# Altium PCB PDB REV 23.PcbDoc (part 1 of 2)
Units mil, origin at the board's own origin, x right, y up, seen from the top; angles counter-clockwise.
Board outline 3000 x 3000 mil, 4 copper layers (POWER/SIGNAL, SIG_GND, GND, Signal), stack 23.756 mil thick; 77 components, 56 nets, 261 pads, 101 vias.
Unrouted connection lines stored in the file: 79.
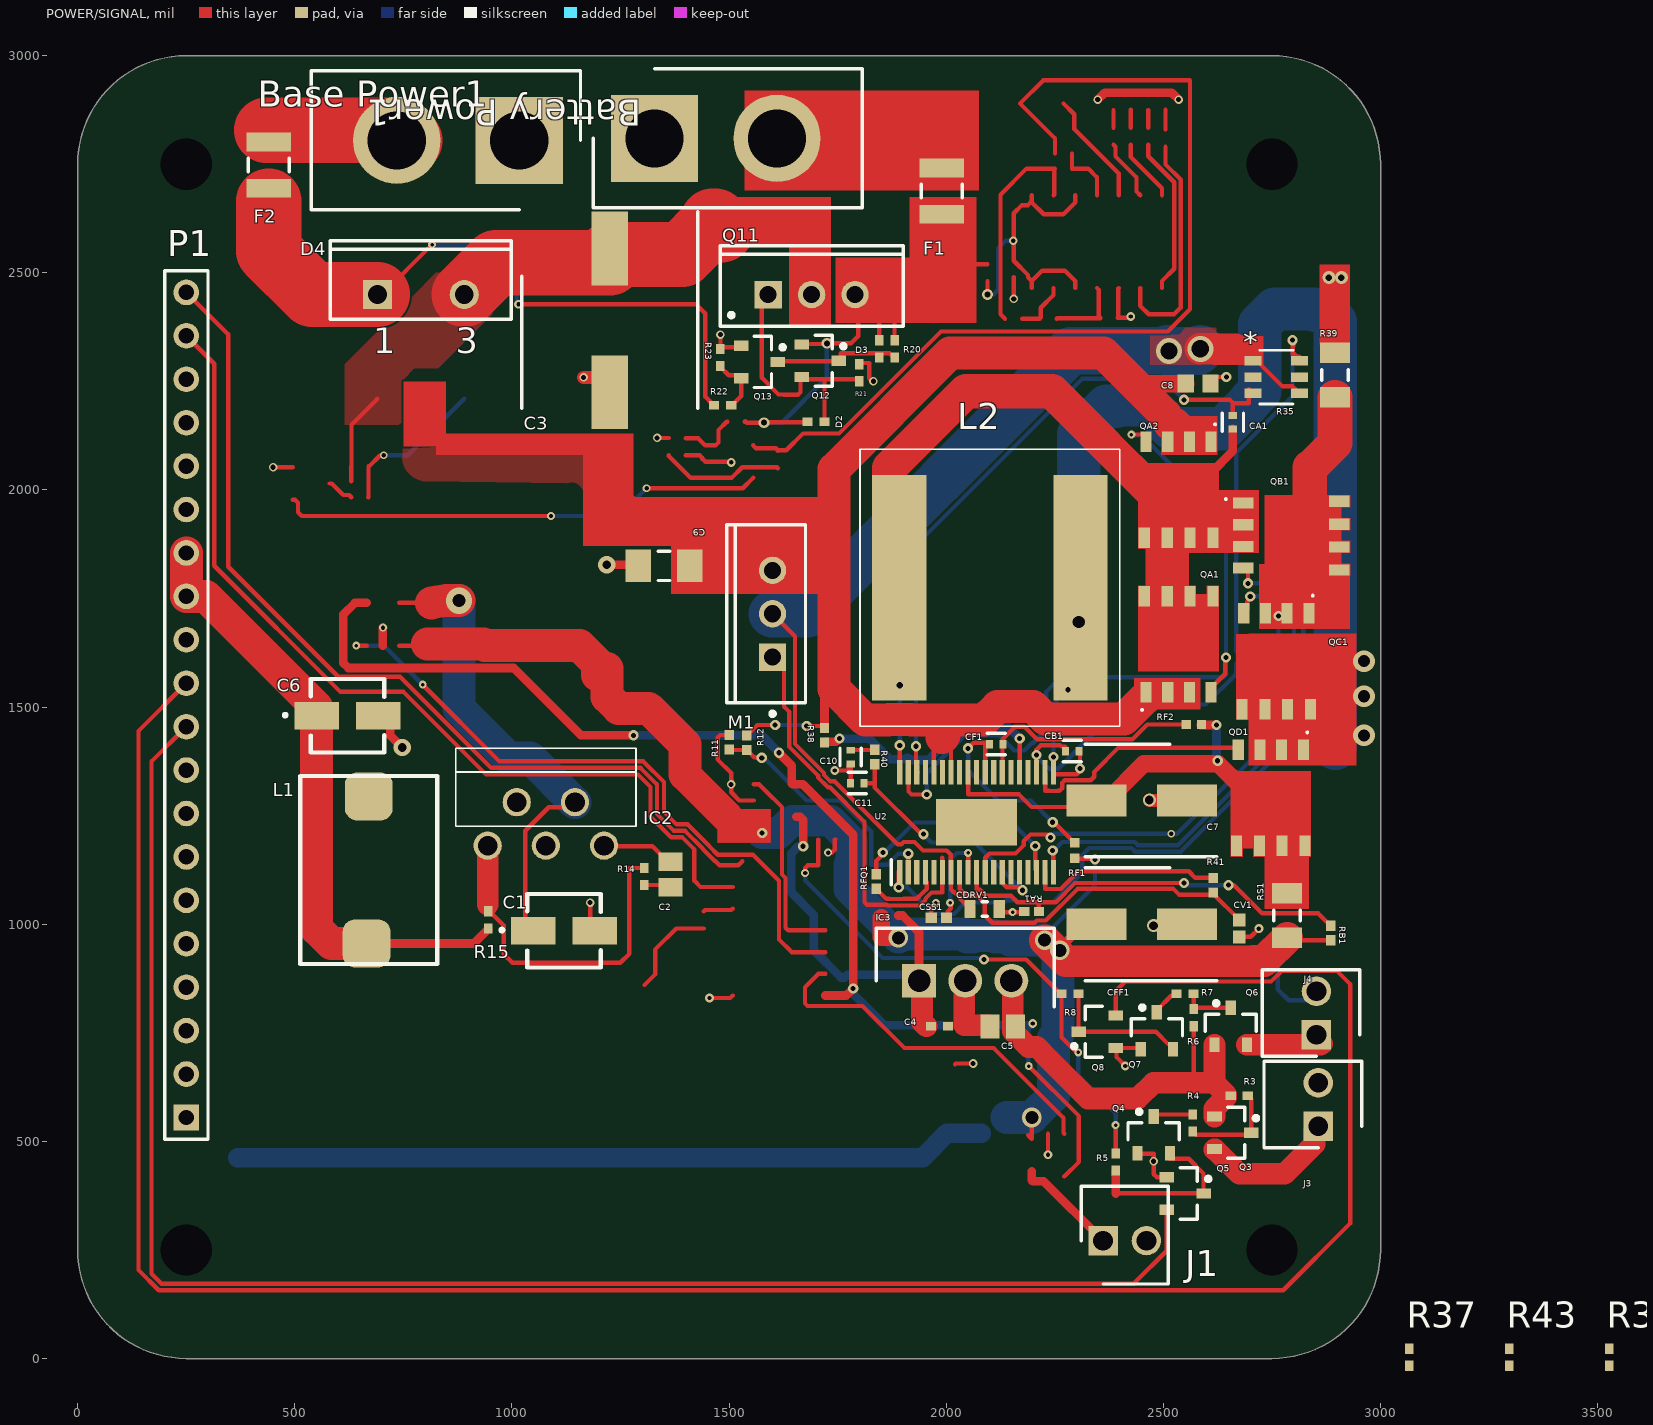
[diagram p0: POWER/SIGNAL view]
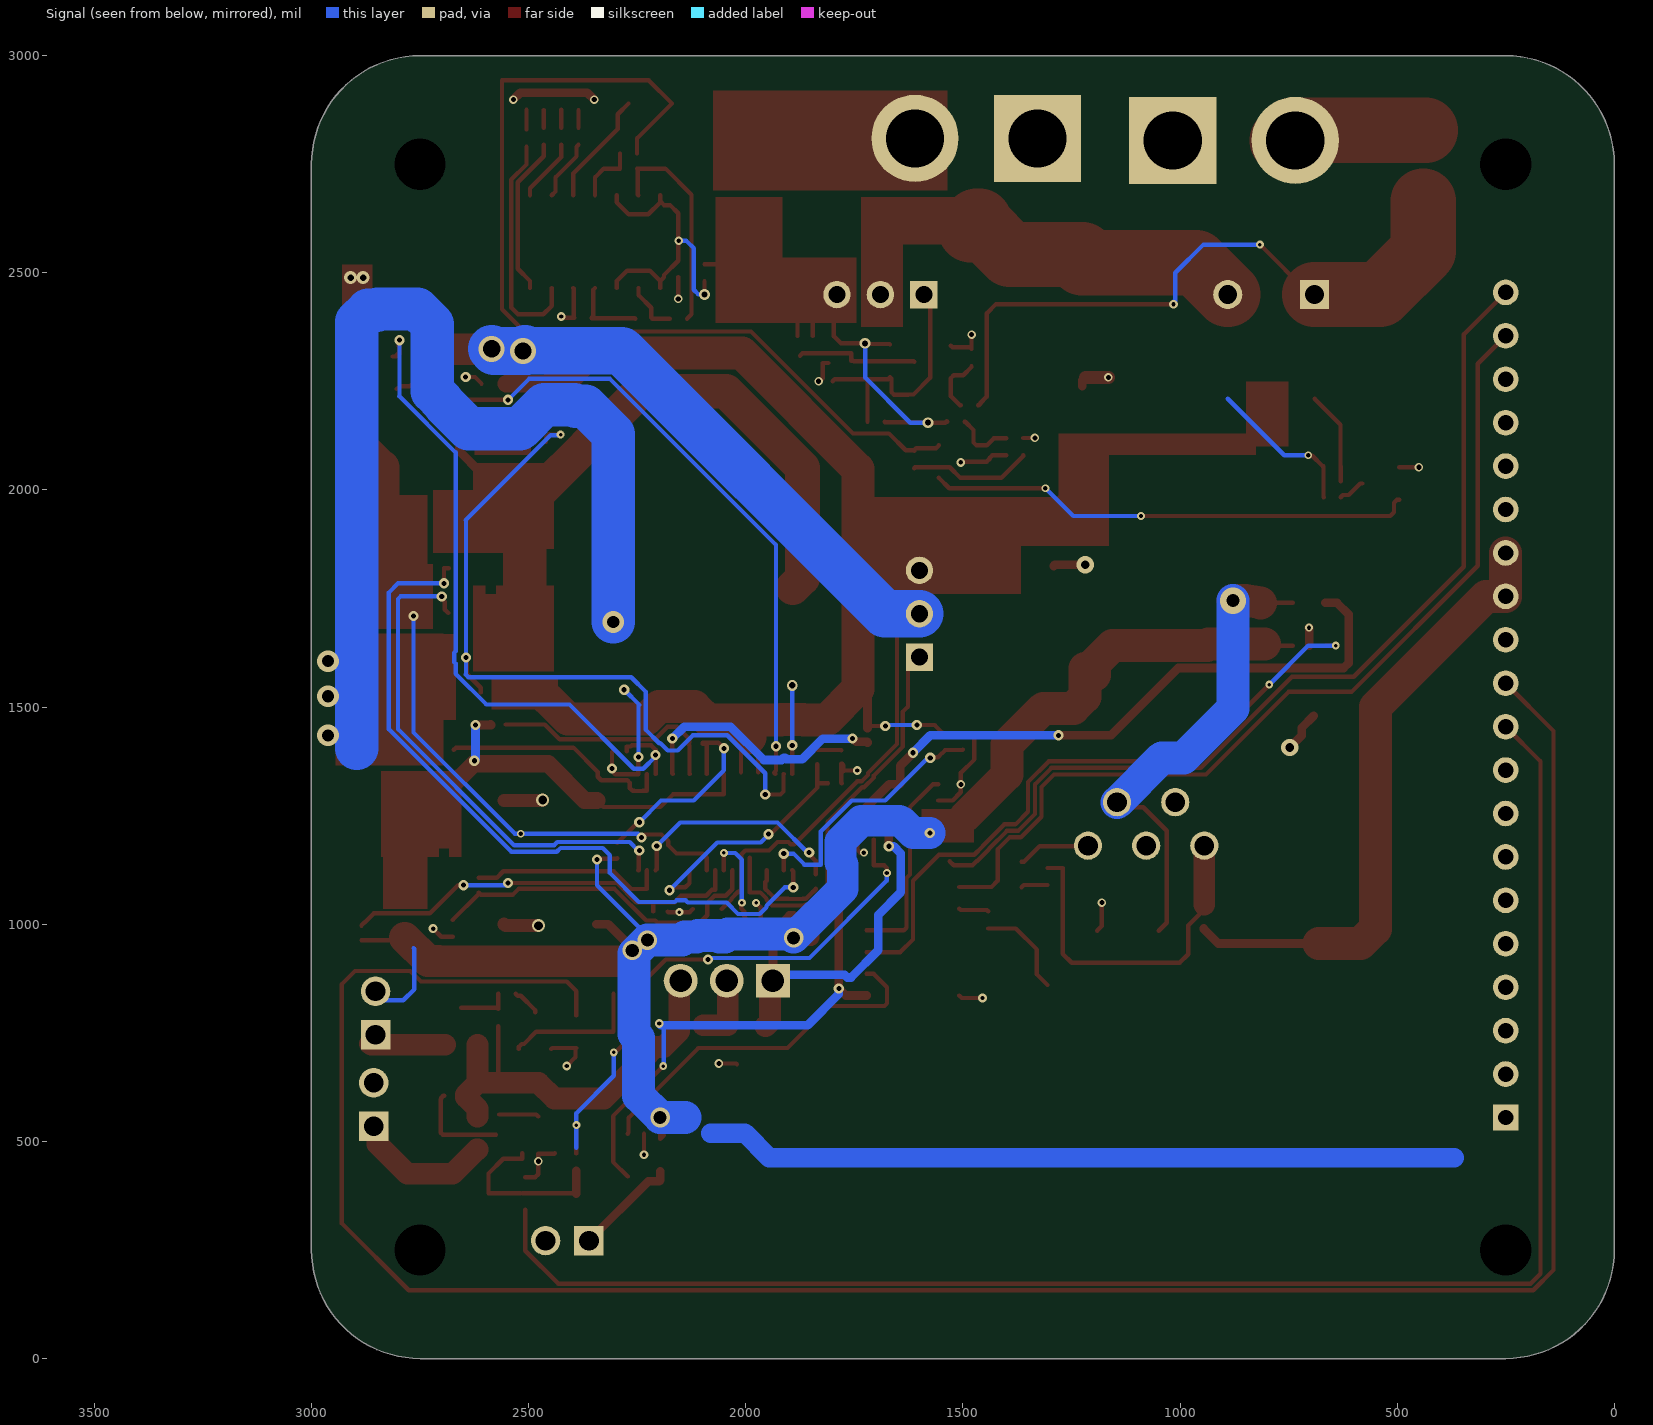
[diagram p1: Signal view, seen from below]
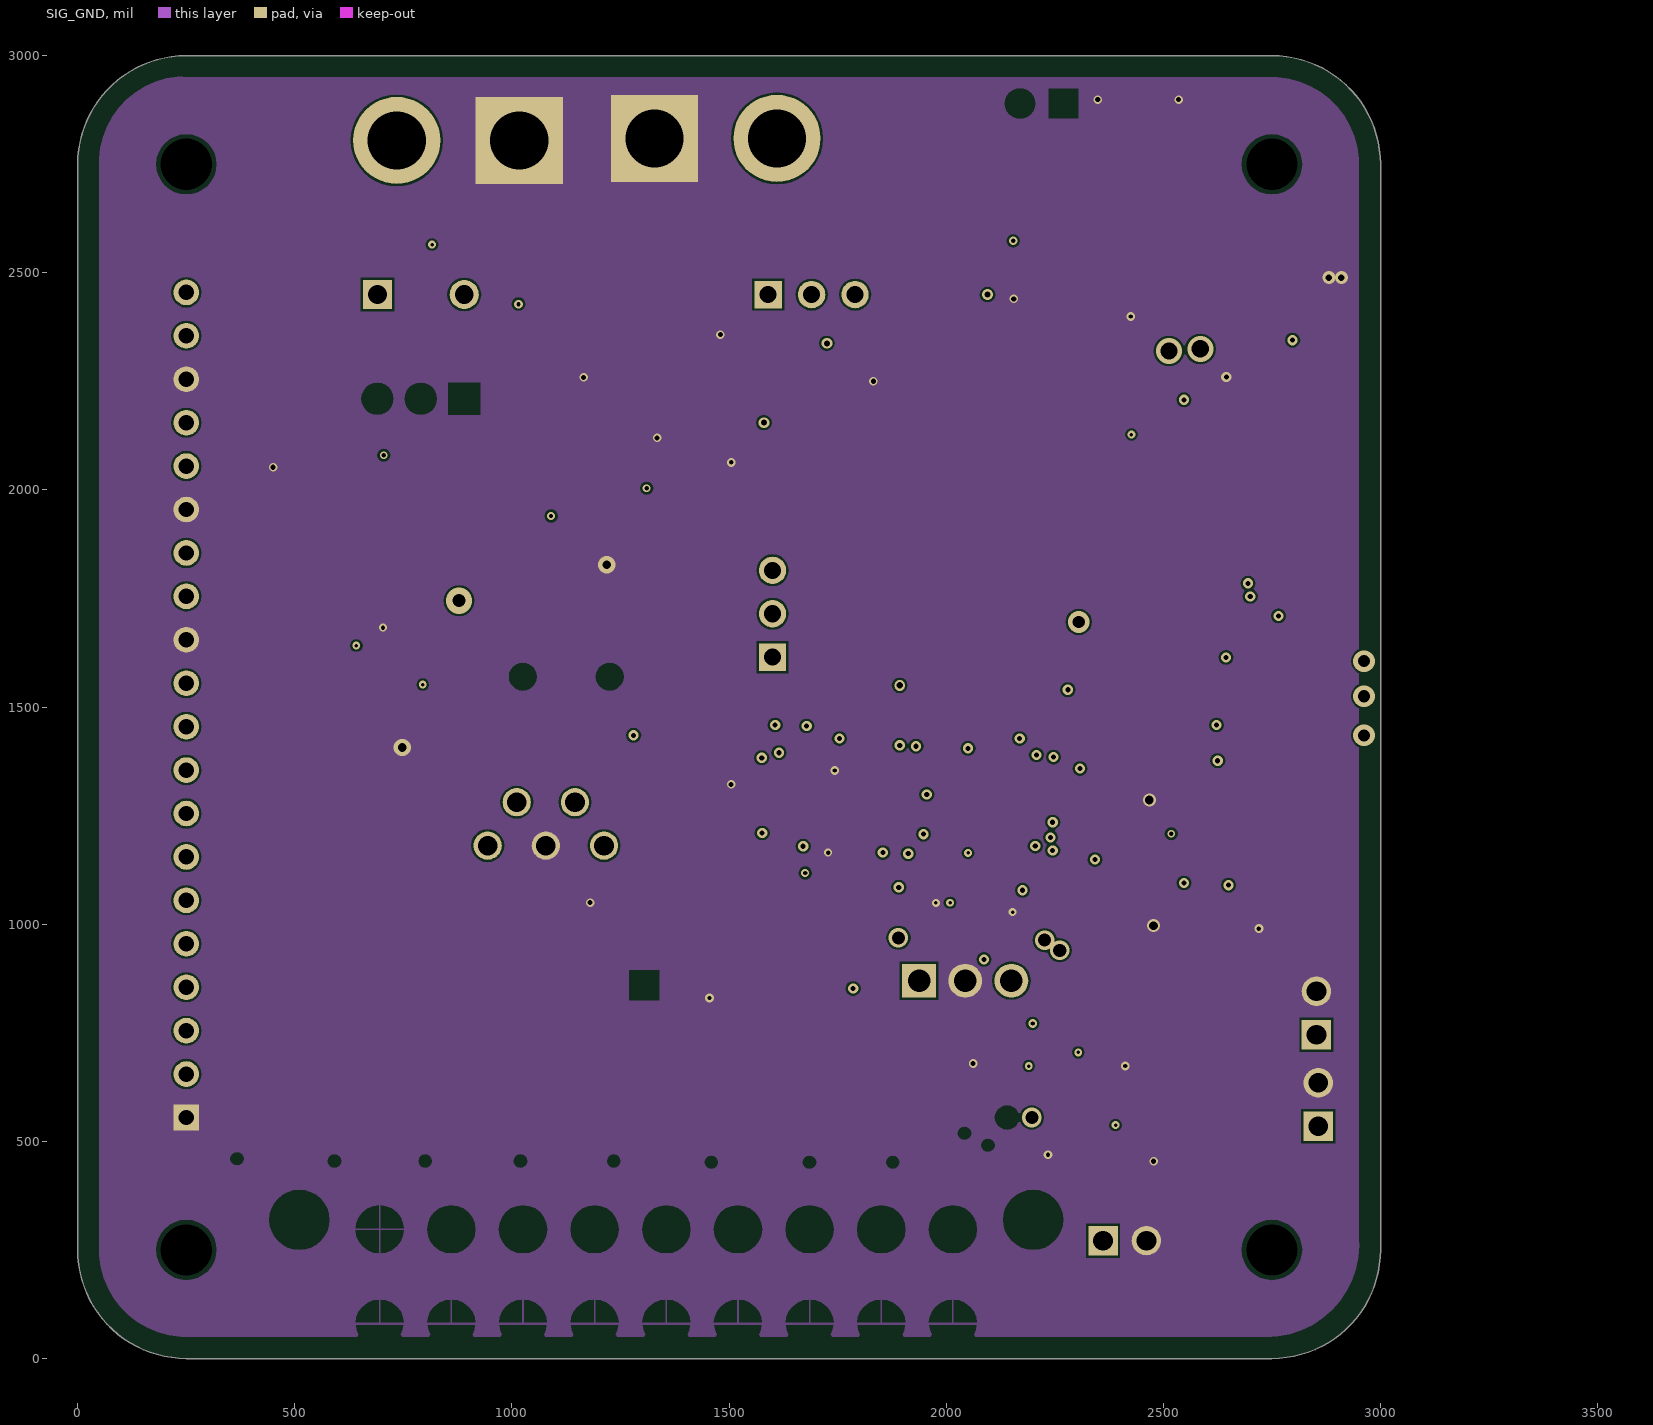
[diagram p2: SIG_GND]
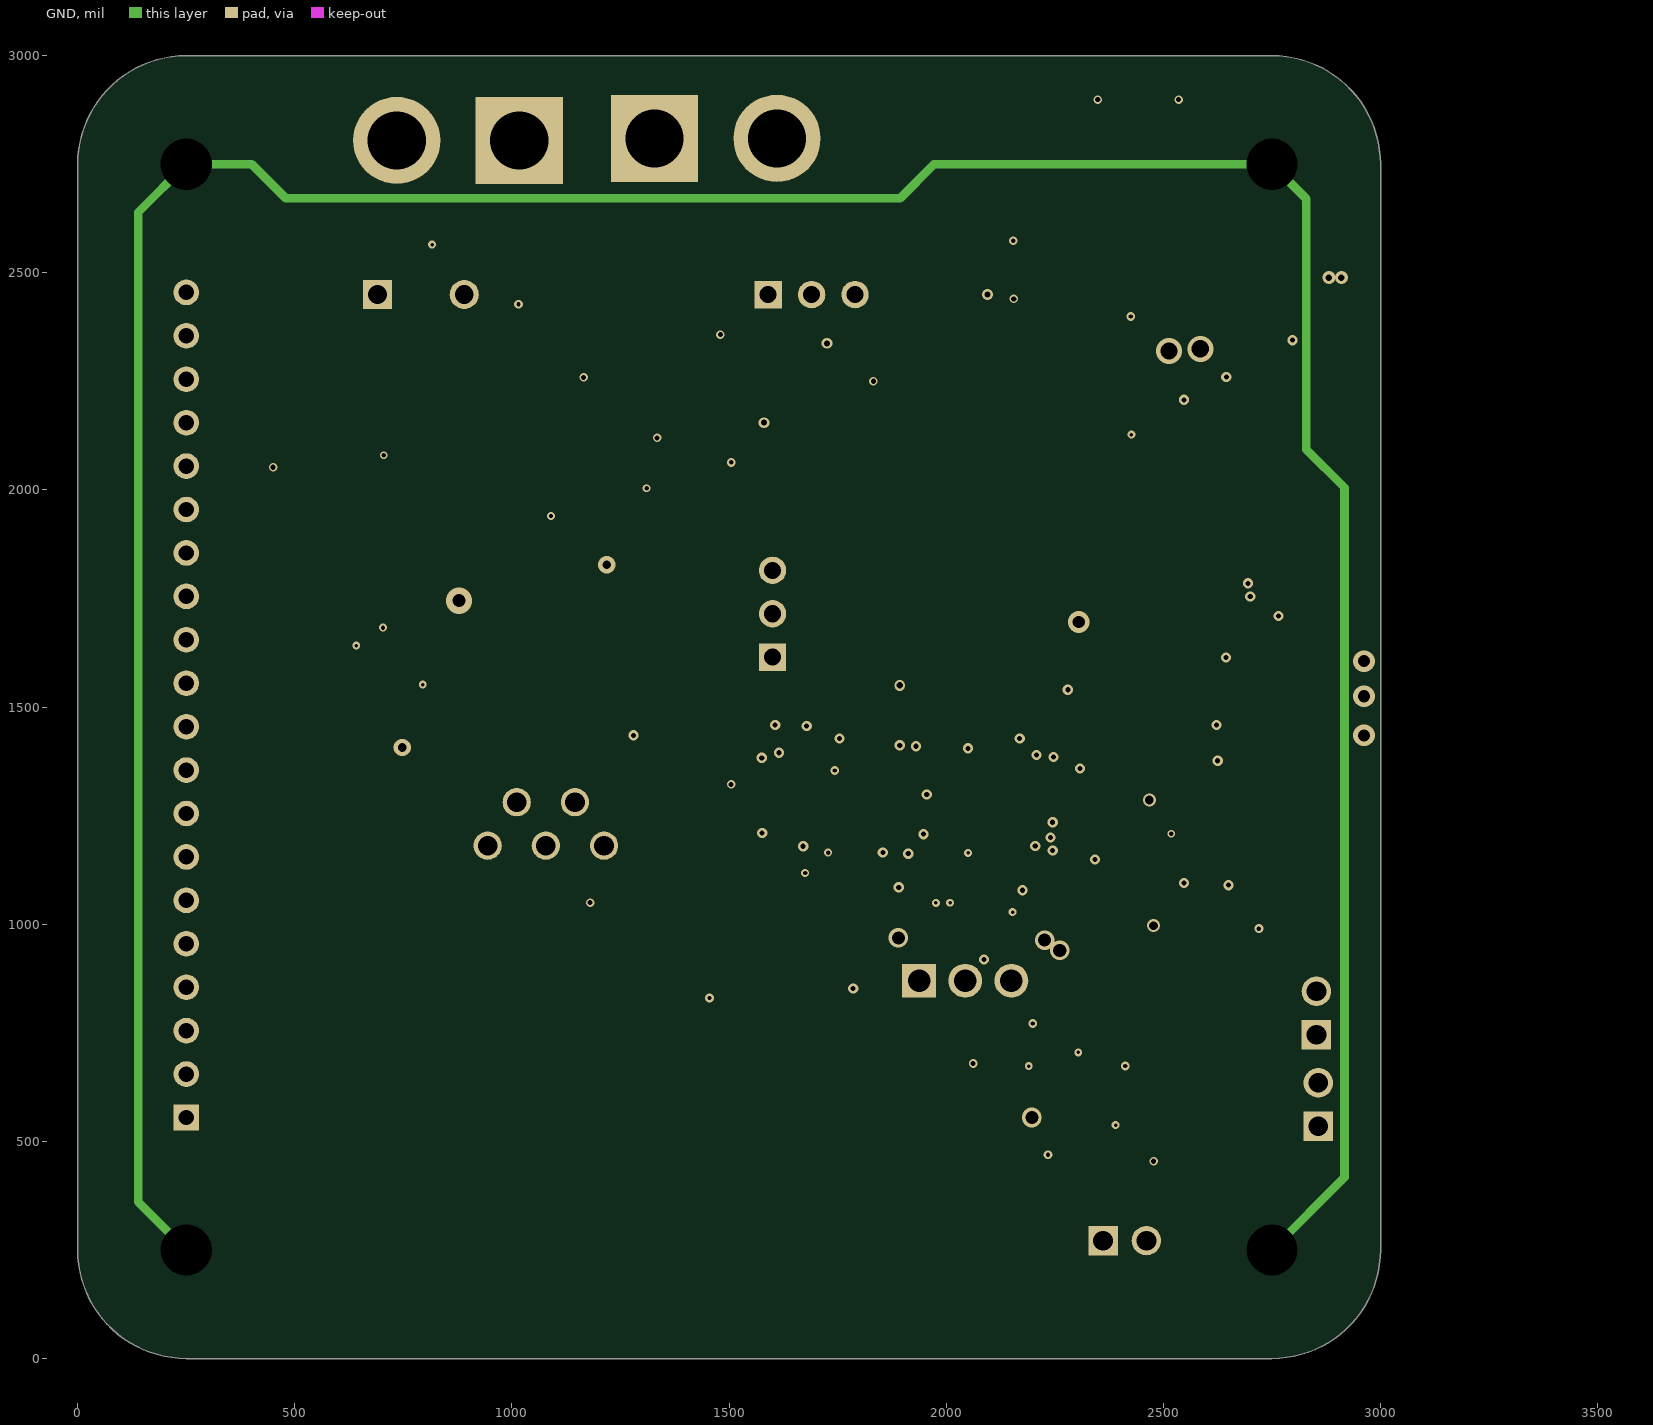
[diagram p3: GND]

## Layer stack, top to bottom
Top Solder: solder mask 0.4, Solder Resist, Dk 3.5
POWER/SIGNAL: signal copper 1.4
Dielectric 2: prepreg 2.8, PP-006, Dk 4.1
SIG_GND: signal copper 1.3778
Dielectric 1: dielectric 12.6, FR-4, Dk 4.8
GND: signal copper 1.3778
Dielectric 3: prepreg 2.8, PP-006, Dk 4.1
Signal: signal copper 1.4
Bottom Solder: solder mask 0.4, Solder Resist, Dk 3.5

## Board outline
250,0 cw(c250,250) 0,250 0,2750 cw(c250,2750) 250,3000 2750,3000 cw(c2750,2750) 3000,2750 3000,250 cw(c2750,250) 2750,0

## Design rules (kind name [scope] priority, off if disabled: settings)
BoardOutlineClearance [All] p1: gap=7.87 ignorepadtopadclearanceinfootprint=FALSE
Clearance [All] p1: gap=5 ignorepadtopadclearanceinfootprint=FALSE except(3.54: Arc-Arc Arc-Track Track-Track; 7.87: Arc-THPad Track-THPad; 9.84: Arc-Hole Track-Hole SMDPad-Hole THPad-Hole Via-Hole Fill-Hole Poly-Hole Region-Hole Text-Hole; 10: Arc-Via Track-Via)
ComponentClearance [All] p1: gap=5 collisioncheckmode=3 verticalgap=5 showdistances=TRUE
DiffPairsRouting [All] p1: maxlimit=10 minlimit=5 mostfreqgap=10 toplayer_prefgap=5 toplayer_minwidth=5 toplayer_maxwidth=1000 toplayer_prefwidth=5 midlayer1_mingap=10 midlayer1_minwidth=15 midlayer1_maxwidth=15 midlayer1_prefwidth=15 midlayer2_mingap=10 midlayer2_minwidth=15 midlayer2_maxwidth=15 midlayer2_prefwidth=15 bottomlayer_prefgap=5 bottomlayer_minwidth=5 bottomlayer_maxwidth=1000 bottomlayer_prefwidth=5 maxuncoupledlength=500
Height [All] p1: minheight=0 maxheight=71497.94 prefheight=500
HoleSize [All] p1: absolutevalues=TRUE maxlimit=248.03 minlimit=7.87 maxpercent=80.000 minpercent=20.000
HoleToHoleClearance [All] p1: gap=21.26 allowstackedmicrovias=FALSE
MinimumAnnularRing [All] p1: minimumring=7.87
MinimumSolderMaskSliver [All] p1: minsoldermaskwidth=0
PlaneClearance [All] p1: clearance=5
PlaneConnect PlaneConnectPowerPads [InPadClass('PowerPads')] p1: planeconnectstyle=Direct reliefexpansion=20 reliefentries=4 reliefconductorwidth=10 reliefairgap=10
PlaneConnect [All] p2: pad.planeconnectstyle=Relief pad.reliefexpansion=11.81 pad.reliefentries=4 pad.reliefconductorwidth=5 pad.reliefairgap=5 via.planeconnectstyle=Direct via.reliefexpansion=11.81 via.reliefentries=4 via.reliefconductorwidth=5 via.reliefairgap=5
PolygonConnect PolygonConnectPowerPads [All vs (InPadClass('PowerPads'))] p1: connectstyle=Direct reliefconductorwidth=10 reliefentries=4 polygonreliefangle="90 Angle" airgapwidth=10
PolygonConnect [All] p2: thpad.connectstyle=Relief thpad.reliefconductorwidth=5 thpad.reliefentries=4 thpad.polygonreliefangle="90 Angle" thpad.airgapwidth=5 smdpad.connectstyle=Relief smdpad.reliefconductorwidth=5 smdpad.reliefentries=4 smdpad.polygonreliefangle="90 Angle" smdpad.airgapwidth=5 via.connectstyle=Direct via.reliefconductorwidth=5 via.reliefentries=4 via.polygonreliefangle="90 Angle" via.airgapwidth=5
RoutingVias [All] p1: holewidth=11.81 width=23.62 viastyle="Through Hole" minholewidth=7.87 minwidth=17.72 maxholewidth=248.03 maxwidth=259.84
SilkToSilkClearance [All] p1: silktosilkclearance=0
SilkToSolderMaskClearance [IsPad] p1: minsilkscreentomaskgap=5 clearancetoexposedcopper=TRUE
SolderMaskExpansion [All] p1: expansion=2.95
Width [All] p1: maxlimit=1000 minlimit=3.5 preferedwidth=5 midlayer1_maxwidth=100 midlayer2_maxwidth=100 midlayer2_prefwidth=3.5 bottomlayer_prefwidth=3.5 minimp=50.000000 maximp=50.000000 favimp=50.000000
20 further rules are at their usual default settings.

## Classes and differential pairs
component class U_SwitchingRegulator: C7 C8 C9 C10 C11 CA1 CB1 CDRV1 CF1 CFF1 CSS1 CV1 L2 M1 QA1 QA2 QB1 QC1 QD1 R11 R12 R35 R38 R39 R40 R41 RA1 RB1 RF1 RF2 RFQ1 RS1 U2
component class U_Switching_Scheme: C3 D2 D3 D4 Q11 Q12 Q13 R20 R21 R22 R23 R36 R37 R43
component class U_Supply&Switching: "Base Power1" "Battery Power1" F1 F2
component class U_Regulation: C1 C2 C4 C5 C6 IC2 IC3 L1 R14 R15
component class U_BusDistribution: J1 J3 J4 P1 Q3 Q4 Q5 Q6 Q7 Q8 R3 R4 R5 R6 R7 R8

## Components (designator, comment, footprint, x,y, rotation, side; value= is the part's Value field where it differs from the comment)
"Base Power1" "PRT-10474" PRT-10474 537.16,2644.5 r0 top
"Battery Power1" "PRT-10474" PRT-10474 1807.74,2970.19 r180 top
C1 "100nF" 865230640001 1120,985 r0 top
C2 "10uF Cap" C0805 1365,1114.53 r90 top value=10uF
C3 "EEE-FN1K470UL" CAPAE1030X1450N 1225,2390.74 r270 top value=47uF
C4 "C1005JB1V334K050BC" 0402 1984.53,765 r180 top value=330nF
C5 "CS0402KRX7R8BB104" C0805 2130,765 r0 top value=.1uF
C6 "100nF" 865230640001 620.87,1480 r0 top
C7 "EEE-1VA330WP" CAPAE660X800N 2450,1285 r180 top value=33uF
C8 "0.22uF 1206" CAPC1608X90X35ML10T15 2580,2245 r180 top
C9 "4.7uF 1206" CAPC3216X180X50ML20T25 1350,1825 r0 top
C10 "500R07W103KV4T" FP-GRM15-MFG 1780,1385 r270 top value=0.10µF
C11 "500R07W103KV4T" FP-GRM15-MFG 1795,1325 r180 top value=0.10µF
CA1 "CL05A224KO5NNNC" FP-GRM15-MFG 2660,2156.1 r90 top value=0.22µF
CB1 "CL05A224KO5NNNC" FP-GRM15-MFG 2290,1398.72 r0 top value=0.22µF
CDRV1 "C1608X5R1A106K080AC" CAPC1608X90X20ML10 2088.57,1035 r180 top
CF1 "C1608X5R1C335K080AC" FP-GRM15-MFG 2115,1415 r0 top value=3.3uF
CFF1 "220uF 6.6mm" CAPAE660X800N 2450,1000 r180 top value=Value
CSS1 "GRM155R71H472KA01J" CAPC1005X55X25NL05T10 1983.11,1015 r0 top
CV1 "GRM155R60J225ME15D" CAPC1005X55X25ML05T10 2675,990.31 r90 top value=2.2uF
D2 "BZT52C9V1LP-7" 0402 1700,2157.2 r180 top
D3 "BZT52C9V1LP-7" 0402 1846,2325 r90 top
D4 "STPSC20065DY" TO-220AC 790,2450 r0 top
F1 "Battery Power Fuse" 14-1210 1990,2688.15 r270 top
F2 "Ground Power Fuse" 14-1210 440,2748.15 r270 top
IC2 "MC33167TG" MC33167TG 943.98,1180 r0 top
IC3 "L78S18CV" TO270P460X1020X2008-3P 1937.4,870 r0 top
J1 "640456-2" 16404562 2312,171.04 r0 top
J3 "640456-2" 16404562 2957.19,485.96 r90 top
J4 "640456-2" 16404562 2952.98,696.67 r90 top
L1 "190uH Inductor" PA2982 675.2,1125 r90 top value=190uH
L2 "XAL1510-103MED" XAL1513153MEB 2100.47,1775 r180 top
M1 "IPP024N06N3 G" INF-PG-TO220-3-1_A_V 1600,1715 r180 top
P1 "Header 20" HDR1X20 250,555 r90 top
Q3 "MED power PMOS" SOT23_L 2660.04,520 r0 top
Q4 "Low Power NMOS" SOT23_L 2477.64,514.92 r90 top
Q5 "Low power NMOS" SOT23_L 2550.18,380.16 r0 top
Q6 "MED power PMOS" SOT23_L 2655.04,765 r90 top
Q7 "Low Power NMOS" SOT23_L 2485.04,755 r90 top
Q8 "Low Power NMOS" SOT23_L 2347.72,752.4 r180 top
Q11 "SQP100P06-9M3L_GE3" TO-220AB 1690,2450 r0 top
Q12 "ISS55EP06LMXTSA1" SOT23_L 1710,2297.5 r0 top
Q13 "2N7002NXAK" SOT23_L 1570,2295 r0 top
QA1 "BSC110N06NS3 G" INF-PG-TDSON-8-1_V 2535,1645 r0 top
QA2 "BSC110N06NS3 G" INF-PG-TDSON-8-1_V 2535,2000 r180 top
QB1 "BSC110N06NS3 G" INF-PG-TDSON-8-1_V 2795,1895 r270 top
QC1 "BSC057N08NS3 G" INF-PG-TDSON-8-1_V 2760,1605.35 r180 top
QD1 "BSC057N08NS3 G" INF-PG-TDSON-8-1_V 2747.4,1290.51 r180 top
R3 "Res1" 0402 2674.72,605 r180 top value=1.6k
R4 "CRGP0402F2K2" 0402 2567.54,542.19 r270 top value=2.2k
R5 "Res1" 0402 2390.02,452.34 r90 top value=100k
R6 "Res1" 0402 2570.04,785 r270 top value=1.6k
R7 "CRGP0402F2K2" 0402 2549.72,840 r0 top value=2.2k
R8 "Res1" 0402 2285,840 r180 top value=100k
R11 "RMCF0402FT1K21" RESC1005X40X25NL05T10 1500,1419 r90 top value=1.21K
R12 "RP73PF1E133KBTD" RESC1005X40X25NL05T10 1541,1418 r270 top
R14 "Res8" 0402 1305,1110 r270 top value=68k
R15 "Res9" 0402 945,1010 r270 top value=6.8k
R20 "RC0402FR-0710KL" 0402 1881,2325 r90 top value=10k
R21 "ERJ-PA2F6201X" 0402 1800,2270 r90 top value=6.2k
R22 "CRGP0402F2K2" 0402 1485,2195 r180 top value=2.2k
R23 "RC0805JR-071KL" 0402 1480,2305 r270 top value=1k
R35 "Part Number: RF04UA2DTR" RF04 2750,2270 r0 top value=Value
R36 "ERJ-PA2F6201X" 0402 3526.5,3 r90 top value=6.2k
R37 "CRGP0402F2K2" 0402 3066,3 r90 top value=2.2k
R38 "RC0402JR-070RL" RESC1005X40X25NL05T10 1719.68,1435 r270 top
R39 "WSL12064L000FEA" RESC3216X89X51LL25T25 2895,2265 r270 top
R40 "10k 0402" RESC1005X40X25NL05T10 1835,1385 r90 top
R41 "100k 0402" RESC1005X40X25NL05T10 2615,1090 r90 top
R43 "RC0402FR-0710KL" 0402 3296,3 r90 top value=100k
RA1 "12.1k 0402" RESC1005X40X25NL05T10 2196.64,1029.38 r0 top
RB1 "230k 0402" RESC1005X40X25NL05T10 2885,980 r270 top
RF1 "100R 0402" RESC1005X40X25NL05T05 2295.63,1170 r270 top
RF2 "100R 0402" RESC1005X40X25NL05T05 2570.04,1460 r0 top
RFQ1 "57.9k 0402" RESC1005X40X25NL05T10 1838.6,1098.18 r90 top
RS1 "WSL12064L000FEA" RESC3216X89X51LL25T25 2785,1020 r270 top
U2 "Part Number: LTC3779HFE#PBF" SOP50P640X120-39N 2070,1235 r90 top value=Value

## Footprints (in the part's own frame and the unit in brackets; to place one, negate y for a bottom-side part, rotate by r counter-clockwise, add the part's x,y. Pads: shape width x height; smd on the part's side, far side on the other; paste and mask are expansions set on the pad)
14-1210 [mm] "Chip Resistor, Body 3.2x2.5mm, IPC High Density"
  rect 1.1x2.6 smd: 1(-1.35,0) 2(1.35,0)
  silkscreen extent -0.4,-1.2 0.4,1.2, body extent -1.68,-1.32 1.68,1.32, height 0.9
0402 [mm] "Chip Capacitor, Body 1.0x0.5mm, IPC High Density"
  rect 0.6x0.5 smd: 1(-0.5,0) 2(0.5,0)
  body extent -0.55,-0.3 0.55,0.3, height 1.3
16404562 [mm]
  rect 1.725x1.725 hole 1.15: 1(1.245,2.552)
  round 1.725 hole 1.15: 2(3.785,2.552)
  silkscreen extent -0.03,0.01 5.05,5.73, body extent 0.1,0.08 5.18,5.92, height 10.03
865230640001 [mm]
  rect 2.6x1.6 smd: 1(-1.8,0) 2(1.8,0)
  silkscreen extent -3.71,-2.15 2.15,2.15, body extent -2.54,-2.54 2.54,2.54, height 5.08
C0805 [mm] "Chip Capacitor, Body 2.0x1.3mm, IPC High Density"
  rect 1.1x1.4 smd: 1(-0.75,0) 2(0.75,0)
  body extent -1.1,-0.72 1.1,0.72, height 1.4
CAPAE660X800N [mm]
  rect 3.5x1.85 smd: 1(-2.65,0) 2(2.65,0)
  silkscreen extent -4.4,-3.3 3.3,3.3, body extent -3.7,-3.4 3.7,3.4, height 8
CAPAE1030X1450N [mm]
  rect 4.3x2.15 smd: 1(-4.2,0) 2(4.2,0)
  silkscreen extent -6.35,-5.15 5.15,5.15, body extent -5.65,-5.25 5.65,5.25, height 14.5
CAPC1005X55X25ML05T10 [mm] "Chip Capacitor, 2-Leads, Body 1.00x0.50mm, IPC Low Density"
  rect 0.76x0.72 smd: 1(-0.49,0) 2(0.49,0)
  body extent -0.53,-0.28 0.53,0.27, height 0.55
CAPC1005X55X25NL05T10 [mm] "Chip Capacitor, 2-Leads, Body 1.00x0.50mm, IPC Medium Density"
  rect 0.66x0.62 smd: 1(-0.44,0) 2(0.44,0)
  body extent -0.53,-0.28 0.53,0.27, height 0.55
CAPC1608X90X20ML10 [mm] "Chip Capacitor, 2-Leads, Body 1.70x0.90mm, IPC Low Density"
  rect 0.65x1.05 smd: 1(-0.85,0) 2(0.85,0)
  silkscreen extent -0.15,-0.43 0.15,0.43, body extent -0.85,-0.45 0.85,0.45, height 0.9
CAPC1608X90X35ML10T15 [mm] "Chip Capacitor, 2-Leads, Body 1.7x0.9mm, IPC Low Density"
  rect 0.95x1.05 smd: 1(-0.725,0) 2(0.725,0)
  body extent -0.85,-0.45 0.85,0.45, height 0.9
CAPC3216X180X50ML20T25 [mm] "Chip Capacitor, 2-Leads, Body 3.40x1.80mm, IPC Low Density"
  rect 1.5x1.9 smd: 1(-1.5,0) 2(1.5,0)
  silkscreen extent -0.35,-0.85 0.35,0.85, body extent -1.7,-0.9 1.7,0.9, height 1.8
FP-GRM15-MFG [mm]
  rect 0.4x0.5 smd paste+0 mask+0: 1(-0.4,0) 2(0.4,0)
  silkscreen extent -0.53,-0.63 0.53,0.63, body extent -0.7,-0.38 0.7,0.38, height 0.25
HDR1X20 [mm] "Connector; Header; 20 Position"
  rect 1.5x1.5 hole 0.9: 1(0,0)
  round 1.5 hole 0.9: 2(2.54,0) 3(5.08,0) 4(7.62,0) 5(10.16,0) 6(12.7,0) 7(15.24,0) 8(17.78,0) 9(20.32,0) 10(22.86,0) 11(25.4,0) 12(27.94,0) 13(30.48,0) 14(33.02,0) 15(35.56,0) 16(38.1,0) 17(40.64,0) 18(43.18,0) 19(45.72,0) 20(48.26,0)
  silkscreen extent -1.27,-1.27 49.53,1.27, body extent 24.08,-1 24.18,1, height 0.23
INF-PG-TDSON-8-1_V [mm] "TDSON, 8-Leads, Body 6.15x5.15mm, Pitch 1.27mm"
  rect 0.65x1.2 smd: 1(-1.905,-2.825) 2(-0.635,-2.825) 3(0.635,-2.825) 4(1.905,-2.825) 5(2.007,2.794) 6(0.66,2.794) 7(-0.66,2.794) 8(-2.007,2.794)
  POWER/SIGNAL region: -2.35,2.925 -2.35,-1.575 2.35,-1.575 2.35,2.925
  POWER/SIGNAL region: -2.35,2.925 -1.65,2.925 -1.65,3.425 -2.35,3.425
  POWER/SIGNAL region: 1.65,2.925 2.35,2.925 2.35,3.425 1.65,3.425
  POWER/SIGNAL region: -1.015,2.925 -0.315,2.925 -0.315,3.425 -1.015,3.425
  POWER/SIGNAL region: 0.315,2.925 1.015,2.925 1.015,3.425 0.315,3.425
  silkscreen extent -2.23,-3.94 -2.03,-3.74, body extent -2.58,-3.08 2.58,3.08, height 1
INF-PG-TO220-3-1_A_V [mm] "FM, 3-Leads, Body 10.03x8.98mm, Pitch 2.54mm"
  rect 1.6x1.6 hole 1: 1(0,2.54)
  round 1.6 hole 1: 2(0,0) 3(0,-2.54)
  silkscreen extent -1.93,-5.2 2.67,5.97, body extent -1.93,-5.2 2.67,5.2, height 20.75
MC33167TG [mm]
  round 1.65 hole 1.15: 1(-0.001,0.025) 2(1.701,2.565) 3(3.403,0.025) 4(5.105,2.565) 5(6.807,0.025)
  silkscreen extent -1.87,1.16 8.67,5.73
PA2982 [mm]
  rrect50% 2.8x2.8 smd: 1(-4.3,0.254) 2(4.3,0.127)
  silkscreen extent -5.5,-3.87 5.5,4.13
PRT-10474 [mm]
  rect 5.1x5.1 hole 3.4: 1(12.18,4.077)
  round 5.1 hole 3.4: 2(5.016,4.077)
  silkscreen extent 0.03,0.01 15.76,8.14, body extent -0.08,0.02 15.86,8.15, height 15.61
RESC1005X40X25NL05T05 [mm] "Chip Resistor, 2-Leads, Body 1.00x0.50mm, IPC Medium Density"
  rect 0.55x0.55 smd: 1(-0.45,0) 2(0.45,0)
  body extent -0.53,-0.27 0.53,0.28, height 0.4
RESC1005X40X25NL05T10 [mm] "Chip Resistor, 2-Leads, Body 1.00x0.50mm, IPC Medium Density"
  rect 0.6x0.55 smd: 1(-0.425,0) 2(0.425,0)
  body extent -0.53,-0.27 0.53,0.28, height 0.4
RESC3216X89X51LL25T25 [mm] "Chip Resistor, 2-Leads, Body 3.20x1.60mm, IPC High Density"
  rect 1.2x1.75 smd: 1(-1.3,0) 2(1.3,0)
  silkscreen extent -0.3,-0.77 0.3,0.77, body extent -1.73,-0.92 1.73,0.92, height 0.89
RF04 [mil]
  rect 40x22 smd paste+0 mask+0: 1(-43.5,27.4) 2(-43.5,-10) 3(-43.5,-47.4) 4(63.5,-47.4) 5(63.5,-10) 6(63.5,27.4)
  silkscreen extent -28,-72 48,52, body extent 10,-10 20,0, height 10
SOP50P640X120-39N [mm]
  rect 1.45x0.3 smd: 1(-2.925,4.5) 2(-2.925,4) 3(-2.925,3.5) 4(-2.925,3) 5(-2.925,2.5) 6(-2.925,2) 7(-2.925,1.5) 8(-2.925,1) 9(-2.925,0.5) 10(-2.925,0) 11(-2.925,-0.5) 12(-2.925,-1) 13(-2.925,-1.5) 14(-2.925,-2) 15(-2.925,-2.5) 16(-2.925,-3) 17(-2.925,-3.5) 18(-2.925,-4) 19(-2.925,-4.5) 20(2.925,-4.5) 21(2.925,-4) 22(2.925,-3.5) 23(2.925,-3) 24(2.925,-2.5) 25(2.925,-2) 26(2.925,-1.5) 27(2.925,-1) 28(2.925,-0.5) 29(2.925,0) 30(2.925,0.5) 31(2.925,1) 32(2.925,1.5) 33(2.925,2) 34(2.925,2.5) 35(2.925,3) 36(2.925,3.5) 37(2.925,4) 38(2.925,4.5)
  rect 2.74x4.75 smd: 39(0,0)
  silkscreen extent -3.65,5 -2.2,5, body extent -3.2,-4.85 3.2,4.85, height 1.2
SOT23_L [mm] "SOT23, 3-Leads, Body 2.9x1.3mm, Pitch 0.95mm, Lead Span 2.3mm - Reverse Pinning, IPC High Density"
  rect 0.85x0.6 smd: 1(1.075,0) 2(-1.075,-0.95) 3(-1.075,0.95)
  silkscreen extent -0.3,-1.5 1.48,1.5, body extent -0.7,-1.5 0.7,1.5, height 1.1
TO270P460X1020X2008-3P [mm]
  rect 1.98x1.98 hole 1.32: 1(0,0)
  round 1.98 hole 1.32: 2(2.7,0) 3(5.4,0)
  silkscreen extent -2.5,-1.53 7.9,3.07, body extent -2.4,-1.53 7.8,3.07, height 19.21
TO-220AB [mm] "TO, Thru-Hole, Vertical, Heatsink Mounted; 3 In-Line Leads; Pitch 2.54 mm"
  rect 1.6x1.6 hole 1: 1(-2.54,0)
  round 1.6 hole 1: 2(0,0) 3(2.54,0)
  silkscreen extent -5.35,-1.85 5.35,2.85, body extent -5.4,-1.9 5.4,2.9, height 19.3
TO-220AC [mm] "TO, Thru-Hole, Vertical, Heatsink Mounted; 3 In-Line Leads (1 Absent); Pitch 2.54 mm"
  rect 1.7x1.7 hole 1.1: 1(-2.54,0)
  round 1.7 hole 1.1: 3(2.54,0)
  silkscreen extent -5.3,-1.45 5.3,3.15
XAL1513153MEB [mm]
  rect 3.18x13.2 smd: 1(-5.3,0) 2(5.3,0)
  silkscreen extent -7.6,-8.1 7.6,8.1, body extent -7.6,-8.1 7.6,8.1, height 13.1

## Part data
"Base Power1" "Battery Power1": "Connector", Manufacturer_Name=SparkFun, Mouser Part Number=474-PRT-10474, Datasheet Link=http://cdn.sparkfun.com/datasheets/Prototyping/xt60.pdf, Height=15.875mm, Manufacturer_Part_Number=PRT-10474, Mouser Price/Stock=https://www.mouser.com/Search/Refine.aspx?Keyword=474-PRT-10474
C1 C6: library part 865230640001, "Capacitor", Manufacturer_Name="Wurth Elektronik", Mouser Part Number=710-865230640001, Arrow Part Number=865230640001, Datasheet Link=http://uk.rs-online.com/webdocs/135a/0900766b8135a640.pdf, Manufacturer_Part_Number=865230640001, Mouser Price/Stock=https://www.mouser.co.uk/ProductDetail/Wurth-Elektronik/865230640001?qs=0KOYDY2FL28kfhWstjZGVg%3D%3D
C2: library part Cap, "Capacitor", LatestRevisionDate=17-Jul-2002, LatestRevisionNote="Re-released for DXP Platform.", PackageDescription="Radial Cap, Thru-Hole; 2 Leads; 0.3 in Pin Spacing", PackageReference=RAD-0.3, Published=8-Jun-2000, Publisher="Altium Limited"
C3: library part "Cap Pol1", "80VDC 47uF 20% 8x10.2mm AEC-Q200", MFG=Panasonic, MFG PN=EEH-ZF1J330P
C4: library part Cap, "CAP CER 0.33UF 35V JB 0402", Manufacturer 1="TDK Corporation", LatestRevisionDate=17-Jul-2002, LatestRevisionNote="Re-released for DXP Platform.", Manufacturer Part Number 1=C1005JB1V334K050BC, PackageDescription="Radial Cap, Thru-Hole; 2 Leads; 0.3 in Pin Spacing", PackageReference=RAD-0.3, Published=8-Jun-2000, Publisher="Altium Limited"
C5: library part Cap, "CAP CER 0.1UF 25V X7R 0402", Manufacturer 1=Yageo, LatestRevisionNote="Re-released for DXP Platform.", Manufacturer Part Number 1=CS0402KRX7R8BB104, PackageDescription="Radial Cap, Thru-Hole; 2 Leads; 0.3 in Pin Spacing", PackageReference=RAD-0.3, Publisher="Altium Limited"
C7: library part UCV1V221MCL1GS, "CAP ALUM 33UF 20% 35V SMD", Manufacturer 1="Panasonic Electronic Components", Manufacturer Part Number 1=EEE-1VA330WP
C8: library part CMP-2100-03642-1, "Chip Capacitor, 10 nF, +/- 10%, 50 V, -55 to 125 degC, 0603 (1608 Metric), RoHS, Tape and Reel", Capacitance=10nF, Case/Package=0603, Case Code (Metric)=1608, Dielectric=X7R, Dielectric Material=Ceramic, Insulation Resistance=10GR, Manufacturer=Murata, Max Operating Temperature=125degC, Min Operating Temperature=-55degC, Package Description="2-Pin Surface Mount Device, Body 1.6 x 0.8 mm", Package Quantity=1, Tolerance=10%, Voltage=50V, Case Code (Imperial)=0603, Datasheet URL=http://search.murata.co.jp/Ceramy/image/img/A01X/G101/ENG/GRM188R71H103KA01-01.pdf, Datasheet Version=42401.0, Depth=0.8mm, Height=0.8mm, Lead Free=LeadFree, Length=1.6mm, Manufacturer URL=http://www.murata.com/, Material=Ceramic, Mount=SurfaceMount, Number of Pins=2, Package Reference=0603, Packaging=TapeandReel, REACH SVHC=Unknown, RoHSCompliant=True, Termination=SMD/SMT, Thickness=0.035inch, Voltage Rating=50V, Voltage Rating (DC)=50V, Width=0.031inch
C9: library part CMP-2000-04991-1, "Chip Capacitor, 1 uF, +/- 10%, 25 V, -55 to 125 degC, 1206 (3216 Metric), RoHS, Tape and Reel", Capacitance=1uF, Capacitance - nF=1000nF, Case Code - in=1206, Case Code - mm=3216, Case Height=1.6mm, Case Length=3.2mm, Dielectric=X7R, Manufacturer=Kemet, Maximum Operating Temperature=+125C, Minimum Operating Temperature=-55C, Operating Temperature Range=-55Cto+125C, Package / Case=1206(3216metric), Package Description="2-Pin Surface Mount Device, Body 3.2 x 1.6 mm", Temperature Coefficient / Code=+/-15%, Tolerance=10%, Voltage Rating=25V, =C1206C105K3RAC7800, Brand=Kemet, Case Width=1.6mm, Class=Class1, Datasheet URL=https://ciiva.com/datasheet-click-18194173?src=ciiva&sig=6daff8c4, Datasheet Version=Jul-14, Dimensions=1.6mmWx3.2mmLx1.6mmH, Factory Pack Quantity=2000, Manufacturer URL=http://www.kemet.com/, Package Reference=1206, Packaging=Reel, Product=GeneralTypeMLCCs, Product Category=MultilayerCeramicCapacitorsMLCC-SMD/SMT, RoHS=Details, Series=C1206C, Termination Style=SMD/SMT, Type=SMDMLCCX7R6.3-250VDCCommericalGrade, Voltage Rating DC=25V
C10 C11: library part CMP-06035-000102-1, "CAP CER 0.1UF 16V X7R 0402", Capacitance=0.10nF, Manufacturer=Murata, Manufacturer 1="Johanson Dielectrics Inc.", Manufacturer Part Number=GRM155R71C104KA88D, Package=GRM15, Temperature="-55°C to +125°C", Temperature Characteristic=X7R, Temperature Range High=+125°C, Temperature Range Low=-55°C, Tolerance=10%, Voltage Rating=16Vdc, Category=Cap, ComponentLink2Description=Datasheet, ComponentLink2URL=https://search.murata.co.jp/Ceramy/image/img/A01X/G101/ENG/GRM155R71H471KA01-01A.pdf, Device Class L1="Passive Components", Device Class L2=Capacitors, Device Class L3="Ceramic Capacitors", Digikey Description="CAP CER 0.1UF 16V X7R 0402", Height=0.55mm, Ipc Land Pattern Name=CAPC10050X219, Lead Free=yes, Manufacturer Part Number 1=500R07W103KV4T, Material=Ceramic, Mouser Description="0402 0.1 uF 16V ±10 % Tolerance X7R SMT Multilayer Ceramic Capacitor", Octopart=https://octopart.com/grm155r71c104ka88d-murata-196880, RoHS=TRUE, Standoff Height=0mm
CA1 CB1: library part CMP-06035-000102-1, "CAP CER 0.22UF 16V X5R 0402", Manufacturer 1="Samsung Electro-Mechanics", Manufacturer Part Number 1=CL05A224KO5NNNC
CDRV1: library part CMP-2000-04979-1, "Chip Capacitor, 10 uF, +/- 10%, 10 V, -55 to 85 degC, 0603 (1608 Metric), RoHS, Tape and Reel", Capacitance=10µF, Manufacturer=TDK, Operating Temperature=-55degC~85degC, Package / Case=0603(1608Metric), Package Description="2-Pin Surface Mount Device, Body 1.6 x 0.8 mm", Package Reference=603, PCN Part Number=MLCCPartNumberChange30/Nov/2012, Ratings=-, Standard Package=1, Temperature Coefficient=X5R, Tolerance=±10%, Voltage - Rated=10V, Applications=GeneralPurpose, Category=Capacitors, Datasheet URL=http://download.siliconexpert.com/pdfs/2015/4/21/15/54/45/779/tdk_/manual/37024850441143360mlcc_commercial_general_en.pdf, Datasheet Version=Mar-15, Design Resources=20WNon-IsolatedBuckLEDDriverUsingPLLNK460KG, Family=CeramicCapacitors, Features=-, Height - Seated (Max)=-, Kits=445-9003-KIT-ND-KITCAPCERHICAPMLCCSMD, Lead Spacing=-, Lead Style=-, Manufacturer URL=http://www.tdk.com/, Mounting Type=SurfaceMount,MLCC, Online Catalog=CSeries,GeneralPurpose, Other Names=445-7486-1, Packaging=CutTape(CT), Product Training Modules=CSeriesGeneralApplicationsSEAT,CCV,andTVCLDesignToolsGuidetoReplacinganElectrolyticCapacitorwithanMLCC, RoHS Information=RoHSCertificate-MLCC, Series=C, Size / Dimension="0.063\"Lx0.031\"W(1.60mmx0.80mm)", Thickness (Max)="0.035\"(0.90mm)"
CF1: library part CMP-06035-000102-1, "CAP CER 3.3UF 16V X5R 0603", Manufacturer 1="TDK Corporation", Manufacturer Part Number 1=C1608X5R1C335K080AC
CFF1: library part UCV1V221MCL1GS, "No Description Available", Built_By=EMA_Cory, Copyright="Copyright (C) 2018 Accelerated Designs. All rights reserved", Manufacturer_Part_Number=UCV1V221MCL1GS, RefDes=RefDes, SourceLibrary=Nichicon_2019-09-13, Type=DEV, Vendor=Nichicon
CSS1: library part CMP-2008-04033-1, "CAP CER 4700PF 50V X7R 0402", Manufacturer 1=Murata, Manufacturer Part Number 1=GRM155R71H472KA01J
CV1: library part CMP-2008-04543-1, "CAP CER 2.2UF 6.3V X5R 0402", Manufacturer 1="Murata Electronics", Manufacturer Part Number 1=GRM155R60J225ME15D
D2 D3: library part "D Zener", "Zener Diode 9.1V 250mW ±6% Surface Mount X1-DFN1006-2", Package=0402, MFG="Diodes Incorporated", MFG PN=BZT52C9V1LP-7
D4: library part Diode, "Diode Silicon Carbide Schottky 650V 20A Through Hole TO-220AC", MFG=STMicroelectronics, MFG PN=STPSC20065DY
F1 F2: library part "Fuse 1", "Fuse", LatestRevisionDate=17-Jul-2002, LatestRevisionNote="Re-released for DXP Platform.", PackageDescription="Thru-Hole; 2 Leads", PackageReference=PIN-W2/E2.8, Published=8-Jun-2000, Publisher="Altium Limited"
IC2: "Integrated Circuit", Manufacturer_Name="ON Semiconductor", Mouser Part Number=863-MC33167TG, RS Part Number=7862414P, Allied_Number=70340012, Allied Price/Stock=http://www.alliedelec.com/on-semiconductor-mc33167tg/70340012/, Datasheet Link=http://www.onsemi.com/pub/Collateral/MC34167-D.PDF, Manufacturer_Part_Number=MC33167TG, Mouser Price/Stock=https://www.mouser.com/Search/Refine.aspx?Keyword=863-MC33167TG, RS Price/Stock=http://uk.rs-online.com/web/p/products/7862414P
IC3: "Integrated Circuit", Manufacturer_Name=STMicroelectronics, Mouser Part Number=511-L78S18CV, RS Part Number=6869022P, Allied_Number=70013917, Allied Price/Stock=http://www.alliedelec.com/stmicroelectronics-l78s18cv/70013917/, Datasheet Link=http://www.st.com/web/en/resource/technical/document/datasheet/CD00000449.pdf, Height=4.6mm, Manufacturer_Part_Number=L78S18CV, Mouser Price/Stock=https://www.mouser.com/Search/Refine.aspx?Keyword=511-L78S18CV, RS Price/Stock=http://uk.rs-online.com/web/p/products/6869022P
J1 J3 J4: "Connector", Manufacturer_Name="TE Connectivity", Mouser Part Number=571-6404562, RS Part Number=1320355P, Allied_Number=70083642, Allied Price/Stock=https://www.alliedelec.com/te-connectivity-640456-2/70083642/, Datasheet Link=http://www.te.com/commerce/DocumentDelivery/DDEController?Action=showdoc&DocId=Customer+Drawing%7F640456%7FW3%7Fpdf%7FEnglish%7FENG_CD_640456_W3.pdf%7F640456-2, Height=7.747mm, Manufacturer_Part_Number=640456-2, Mouser Price/Stock=https://www.mouser.com/Search/Refine.aspx?Keyword=571-6404562, RS Price/Stock=http://uk.rs-online.com/web/p/products/1320355P
L1: library part Inductor, "Inductor", Code_IEC=1005, Code_JEITA=0402, LatestRevisionDate=29-May-2009, LatestRevisionNote="IPC-7351 Footprint Added.", PackageDescription="Chip Inductor", PackageReference=0402-A, Published=8-Jun-2000, Publisher="Altium Limited"
L2: "Inductor", Manufacturer_Name=COILCRAFT, Mouser Part Number=994-XAL1510-103MED, Arrow Part Number=XAL1510-103MED, Datasheet Link=https://www.coilcraft.com/pdfs/xal1510.pdf, Height=13mm, Manufacturer_Part_Number=XAL1510-103MED, Mouser Price/Stock=https://www.mouser.co.uk/ProductDetail/Coilcraft/XAL1510-103MED?qs=41NYZ3YTmyo92lKEhFAS8w%3D%3D
M1: library part CMP-1091-00132-1, "N-Channel OptiMOS 3 Power-Transistor, 60 V VDS, 120 A ID, -55 to 175 degC, PG-TO220-3-1, Tube, Green", Manufacturer=Infineon, ComponentLink1Description="Manufacturer URL", ComponentLink1URL=http://www.infineon.com/, ComponentLink2Description=Datasheet, ComponentLink2URL=http://www.infineon.com/dgdl/IPP024N06N3_Rev2.2.pdf?folderId=db3a304313b8b5a60113cee8763b02d7&fileId=db3a30432313ff5e01239f1f52a67151, ComponentLink3Description="Package Specification", ComponentLink3URL=http://www.infineon.com/dgdl/IPP028N08N3_Rev1%5B1%5D.0.pdf?folderId=db3a304313b8b5a60113cee8763b02d7&fileId=db3a30432313ff5e0123a3c08e7326b5, DatasheetVersion="Rev. 2.2", Green=TRUE, Halogen-free=TRUE, ID (max)="120 A", IDpuls (max)="480 A", Mounting Technology="Through Hole", PackageDescription="3-Pin Plastic (Green) Transistor Single Outline Package, 10.03 x 8.98 mm Body, 2.54 mm Pitch", PackageReference=PG-TO220-3-1, PackageVersion="Rev. 05, 08/2007", Packing=Tube, PartNumber="IPP024N06N3 G", Polarity=N, Ptot (max)="250 W", QG="206 nC", RDS (on) (max)="2.4 mOhm", Rth="0.6 K/W", RthJA (max)="62 K/W", RthJC (max)="0.6 K/W", VDS (max)="60 V", VGS(th) (max)="4 V", VGS(th) (min)="2 V"
P1: "Header, 20-Pin", LatestRevisionDate=17-Jul-2002, LatestRevisionNote="Re-released for DXP Platform.", Publisher="Altium Limited"
Q3 Q6: library part PMOS-2, "P-Channel Power MOSFET", ComponentLink1Description="Manufacturer Link", ComponentLink1URL=http://www.irf.com/, DatasheetVersion=PD-9.390D, LatestRevisionDate=17-Jul-2002, LatestRevisionNote="Re-released for DXP Platform.", Note="Pin 4 not drawn and electrically connected to Pin 2.", PackageDescription="TO, Thru-Hole, Vertical, Heatsink Mounted; 3 In-Line Leads; Pitch 2.54 mm", PackageReference=TO-220AB, PackageVersion=Feb-1997, Published=8-Jun-2000, Publisher="Altium Limited"
Q4 Q5 Q7 Q8: library part MOSFET-N, "N-Channel MOSFET", LatestRevisionDate=17-Jul-2002, LatestRevisionNote="Re-released for DXP Platform.", PackageDescription="TO, Flat Index; 3 In-Line, Axial Leads; Body Dia. 4.6mm; Lead Dia. 0.5 mm (max)", PackageReference=E3, PackageVersion=1995/1996, Published=8-Jun-2000, Publisher="Altium Limited"
Q11: library part PMOS-2, "P-Channel 60V 100A (Tc) 187W (Tc) Through Hole TO-220AB", ComponentLink1Description="Manufacturer Link", ComponentLink1URL=http://www.irf.com/, DatasheetVersion=PD-9.390D, LatestRevisionDate=17-Jul-2002, LatestRevisionNote="Re-released for DXP Platform.", PackageDescription="TO, Thru-Hole, Vertical, Heatsink Mounted; 3 In-Line Leads; Pitch 2.54 mm", PackageReference=TO-220AB, PackageVersion=Feb-1997, Published=8-Jun-2000, Publisher="Vishay Siliconix"
Q12: library part PMOS-2, "P-Channel 60V 180mA (Ta) 400mW (Ta) Surface Mount PG-SOT23-3-5", ComponentLink1Description="Manufacturer Link", ComponentLink1URL=http://www.irf.com/, MFG="Infineon Technologies", MFG PN=ISS55EP06LMXTSA1, PackageReference=TO-220AB, Publisher=ISS55EP06LMXTSA1
Q13: library part MOSFET-N, "N-Channel 60V 190mA (Ta), 300mA (Tc) 265mW (Ta), 1.33W (Tc) Surface Mount TO-236AB", MDF PN=2N7002NXAK, MFG="Nexperia USA"
QA1 QA2 QB1: library part CMP-1091-00074-1, "N-Channel OptiMOS 3 Power-Transistor, 60 V VDS, 50 A ID, -55 to 150 degC, PG-TDSON-8-1, Reel, Green", Manufacturer=Infineon, ComponentLink1Description="Manufacturer URL", ComponentLink1URL=http://www.infineon.com/, ComponentLink2Description=Datasheet, ComponentLink2URL=http://www.infineon.com/dgdl/BSC110N06NS3_Rev2.3.pdf?folderId=db3a30431ddc9372011ebafa04517f8b&fileId=db3a30431ddc9372011ebb0be43c7fe6, ComponentLink3Description="Package Specification", ComponentLink3URL=http://www.infineon.com/cms/packages/SMD_-_Surface_Mounted_Devices/P-PG-TDSON/P-PG-TDSON-08-01x_2x_3.html?__locale=en, DatasheetVersion="Rev. 2.3", Green=TRUE, Halogen-free=TRUE, ID (max)="50 A", IDpuls (max)="200 A", Mounting Technology="Surface Mount", PackageDescription="8-Pin Plastic (Green) Thin Dual Small Outline Non-Leaded Package, 5.15 x 5.9 mm Body, 1.27 mm Pitch", PackageReference=PG-TDSON-8-1, Packing=Reel, PartNumber="BSC110N06NS3 G", Polarity=N, Ptot (max)="50 W", QG="25 nC", RDS (on) (max)="11 mOhm", Rth="2.5 K/W", RthJA (max)="62 K/W", RthJC (max)="2.5 K/W", VDS (max)="60 V", VGS(th) (max)="4 V", VGS(th) (min)="2 V"
QC1 QD1: library part CMP-1091-00029-1, "N-Channel OptiMOS 3 Power-Transistor, 80 V VDS, 100 A ID, -55 to 150 degC, PG-TDSON-8-1, Reel, Green", Manufacturer=Infineon, ComponentLink1Description="Manufacturer URL", ComponentLink1URL=http://www.infineon.com/, ComponentLink2Description=Datasheet, ComponentLink2URL=http://www.infineon.com/dgdl/BSC057N08NS3G_rev2.4.pdf?folderId=db3a304313b8b5a60113cee8763b02d7&fileId=db3a30431add1d95011ae803c9345616, ComponentLink3Description="Package Specification", ComponentLink3URL=http://www.infineon.com/cms/packages/SMD_-_Surface_Mounted_Devices/P-PG-TDSON/P-PG-TDSON-08-01x_2x_3.html?__locale=en, DatasheetVersion="Rev. 2.4", Green=TRUE, Halogen-free=TRUE, ID (max)="100 A", IDpuls (max)="400 A", Mounting Technology="Surface Mount", PackageDescription="8-Pin Plastic (Green) Thin Dual Small Outline Non-Leaded Package, 5.15 x 5.9 mm Body, 1.27 mm Pitch", PackageReference=PG-TDSON-8-1, Packing=Reel, PartNumber="BSC057N08NS3 G", Polarity=N, Ptot (max)="114 W", QG="42 nC", RDS (on) (max)="5.7 mOhm", Rth="1.1 K/W", RthJA (max)="62 K/W", RthJC (max)="1.1 K/W", VDS (max)="80 V", VGS(th) (max)="3.5 V", VGS(th) (min)="2 V"
R3 R5 R6 R8: "Resistor", LatestRevisionDate=17-Jul-2002, LatestRevisionNote="Re-released for DXP Platform.", PackageDescription="Axial Device, Thru-Hole; 2 Leads; 0.3 in Pin Spacing", PackageReference=AXIAL-0.3, Published=8-Jun-2000, Publisher="Altium Limited"
R4 R7 R22 R37: library part Res1, "2.2 kOhms ±1% 0.125W, 1/8W Chip Resistor 0402 (1005 Metric) Pulse Withstanding Thick Film", MFG="TE Connectivity Passive Product", MFG PN=CRGP0402F2K2
R11: library part CMP-2002-07912-1, "RES 1.21K OHM 1% 1/16W 0402", Manufacturer="Yageo / Phycomp", Part Number=RC0402JR-070RL
R12: library part CMP-2002-07912-1, "RES 133K OHM 0.1% 1/10W 0402", Manufacturer 1="TE Connectivity Passive Product", Manufacturer Part Number 1=RP73PF1E133KBTD
R14 R15: library part Res1, "Resistor", LatestRevisionDate=17-Jul-2002, LatestRevisionNote="Re-released for DXP Platform.", PackageDescription="Axial Device, Thru-Hole; 2 Leads; 0.3 in Pin Spacing", PackageReference=AXIAL-0.3, Published=8-Jun-2000, Publisher="Altium Limited"
R20 R43: library part Res1, "10 kOhms ±1% 0.063W, 1/16W Chip Resistor 0402 (1005 Metric) Thick Film", Manufacturer=Yageo, MFG PN=RC0402FR-0710KL
R21 R36: library part Res1, "±1% 0.2W, 1/5W Chip Resistor 0402 (1005 Metric) Automotive AEC-Q200, Pulse Withstanding Thick Film", Manufacturer="Panasonic Electronic Components", MFG PN=ERJ-PA2F6201X, PackageDescription="±1% 0.2W, 1/5W Chip Resistor 0402 (1005 Metric) Automotive AEC-Q200, Pulse Withstanding Thick Film"
R23: library part Res1, "1 kOhms ±5% 0.125W, 1/8W Chip Resistor 0805 (2012 Metric)  Thick Film", MFG=Yageo, MFG PN=RC0805JR-071KL
R35: library part RF04UA2DTR, "No Description Available", Built_By=EMA_Matt, Copyright="Copyright (C) 2018 Accelerated Designs. All rights reserved", Manufacturer_Part_Number=RF04UA2DTR, RefDes=RefDes, SourceLibrary=Rohm_2019-09-23, Type=DEV, Vendor="ROHM Semiconductor"
R38: library part CMP-2002-07912-1, Manufacturer="Yageo / Phycomp", Part Number=RC0402JR-070RL
R39 RS1: library part CMP-2003-04339-1, "RES SMD 4mR 1% 1/8W 1206", Manufacturer 1="Vishay Dale", Manufacturer Part Number 1=WSL12064L000FEA
R40 R41 RA1 RB1 RFQ1: library part CMP-2002-07912-1, Manufacturer="Yageo / Phycomp", Part Number=RC0402JR-070RL
RF1 RF2: library part CMP-2002-08127-1, Manufacturer="Vishay Dale", Part Number=CRCW0402100RFKED
U2: library part LTC3779HFE#PBF, "No Description Available", Built_By=EMA_Jessica, Copyright="Copyright (C) 2016 Accelerated Designs. All rights reserved", Manufacturer_Part_Number=LTC3779HFE#PBF, RefDes=RefDes, SourceLibrary=Analog_Devices_2018-09-28, Type=DEV, Vendor="Analog Devices Inc"

## Free pads (board coordinates)
  round 60 hole 118.11: 2(250,250) 2(250,2750) 2(2750,250) 2(2750,2750)

## Via types
v1: diameter 23.62, hole 11.81, POWER/SIGNAL to Signal, 40 vias
v2: diameter 19.68, hole 11.81, POWER/SIGNAL to Signal, 12 vias
v3: diameter 18, hole 8, POWER/SIGNAL to Signal, 10 vias
v4: diameter 20, hole 10, POWER/SIGNAL to Signal, 10 vias
v5: diameter 18, hole 10, POWER/SIGNAL to Signal, 7 vias
v6: diameter 50, hole 28, POWER/SIGNAL to Signal, 4 vias
v7: diameter 45, hole 30, POWER/SIGNAL to Signal, 4 vias
v8: diameter 25, hole 14, POWER/SIGNAL to Signal, 3 vias
v9: diameter 60, hole 40, POWER/SIGNAL to Signal, 2 vias
v10: diameter 30, hole 20, POWER/SIGNAL to Signal, 2 vias
v11: diameter 40, hole 20, POWER/SIGNAL to Signal, 2 vias
v12: diameter 30, hole 15, POWER/SIGNAL to Signal, 2 vias
v13: diameter 25, hole 15, POWER/SIGNAL to Signal, 1 vias
v14: diameter 17.8, hole 8, POWER/SIGNAL to Signal, 1 vias
v15: diameter 60, hole 30, POWER/SIGNAL to Signal, 1 vias

## Nets (pads, with @x,y where several pads share a name; then routed paths per layer and width w, separated by ;. In a path a pad name is that pad's centre, name@x,y a point inside that pad or via, vN(x,y) a via of type N, cw(c..) or ccw(c..) an arc to the next point about the centre after c; other vN are vias at no path point)
5VOUT: C6.1 L1.1 P1.13 P1.14 R15.2 | length 1440.4
  POWER/SIGNAL w20: L1.1@680,955.71 912.05,955.71 945,988.66 R15.2@945,990.31
  POWER/SIGNAL w76: P1.14@250,1855 P1.13@250,1755 295,1755 550,1500 C6.1@550,1480 550,989.61 583.9,955.71 L1.1@680,955.71
18VOUT: C5.2 IC3.3 Q3.3 Q6.3 R3.2 R6.2 | length 970.7
  POWER/SIGNAL w10: 2570,645 2570,703.74 2570.04,703.78 R6.2@2570.04,765.31
  POWER/SIGNAL w50: IC3.3@2152.95,872.15 2152.95,753.78 2189.22,717.5 2208.23,717.5 2236.45,689.28 2236.45,688.73 2326.23,598.94 2441.29,598.94 2477.31,634.96 2570,634.96 2617.64,634.96 ; Q6.3@2617.64,722.68 2617.64,634.96 ; Q3.3@2617.72,557.4 2617.72,575.12 2645,602.4 2645,607.6 2617.64,634.96
24VOUT: C1.1 CFF1.2 IC2.4 J1.1 RB1.2 RF1.2 RS1.2 | length 6964.4
  POWER/SIGNAL w10: 740,1641.57 801.6,1641.57 ; 740,1740 780.83,1740 814.17,1706.65 814.17,1730 ; 814.17,1740 814.17,1730 ; v15@872.6,1739.26 v15(878.34,1745) 834.7,1730 814.17,1730 ; C1.1@1049.13,985 1030.51,1003.62 1030.51,1215.51 1084.48,1269.48 1134.48,1269.48 IC2.4@1145,1280 ; 1495.16,1247.6 1568.64,1247.6 1575.45,1240.79 1575.45,1210 v1(1576.14,1210) ; 2188.5,514.41 2191.18,511.73 2197.09,505.83 2197.09,517.64 2197.04,517.68 v7(2197,555) v7(2197,555) ; RF1.2@2295.63,1152.28 2296.77,1151.14 2340.23,1151.14 v1(2342.5,1148.87) ; RS1.2@2785,968.82 2790.55,963.27 RB1.2@2885,963.27
  POWER/SIGNAL w20: 801.6,1641.57 805.52,1645.5 ; 2197.09,431.02 2197.09,410.19 2198.9,408.38 2224.12,408.38 J1.1@2361,271.5 ; v7(2261.39,940) 2261.39,944.89 2316.5,1000 CFF1.2@2343.5,1000
  POWER/SIGNAL w40: 1850.31,1015 1850.31,969.7 1889.04,969.7 v7(1890,968.74)
  POWER/SIGNAL w73: 1398,1344.76 1495.16,1247.6 ; v7(2226.59,963.27) 2275.29,914.56 2706.36,914.56 2707.26,915.46 2731.64,915.46 RS1.2@2785,968.82
  POWER/SIGNAL w76: 805.52,1645.5 934,1645.5 937.95,1641.54 994.09,1641.54 994.99,1642.45 1155.01,1642.45 1197.45,1600.01 1197.45,1574.05 1219.15,1574.05 ; 814.17,1740 849.43,1745.72 v15(878.34,1745) ; 1219.15,1588.5 1219.15,1574.05 ; 1398,1344.76 1398,1413.97 1314.64,1497.33 1245.44,1497.33 1219.15,1523.62 1219.15,1574.05
  Signal w10: v7(2226.59,963.27) 2226.59,963.51 2221.35,968.74 2342.5,1089.89 v1(2342.5,1148.87)
  Signal w45: 368.09,462.78 1946.04,462.78 2002.04,518.78 2081.09,518.78
  Signal w73: v1(1576.14,1210) 1614.61,1210 1639.61,1235 1642.92,1235 1646.23,1238.31 1733.93,1238.31 1782.01,1190.23 1782.01,1142.63 1776.69,1137.31 1776.69,1082.05 v7(1890,968.74)
  Signal w76: v15(878.34,1745) 878.34,1496.66 991.81,1383.19 1041.81,1383.19 IC2.4@1145,1280 ; v7@1888.46,978.74 1890.04,977.16 2041.24,977.16 2048.16,970.24 2060.64,970.24 2064.18,973.79 2109.59,973.79 2113.14,970.24 2140.27,970.24 2147.24,963.27 v7(2226.59,963.27) 2256.92,932.94 2256.92,747.42 2247,737.5 2247,605 v7(2197,555) 2140,555
BATTPOS: "Battery Power1.2" F1.1
BG1: QB1.4 U2.1 | length 1706.1
  POWER/SIGNAL w10: v1(1890.76,1085) 1890.76,1121.93 U2.1@1892.83,1124 ; QB1.4@2683.78,1820 2694.57,1820 2695,1820.43 v1(2695,1785)
  Signal w10: v1(1890.76,1085) 1909.94,1085 1952.23,1042.71 1952.23,1039.2 1967.73,1023.7 2017.71,1023.7 2044.01,1050 2133.42,1050 2138.42,1055 2159.62,1055 2163.24,1051.38 2246.38,1051.38 2312.87,1117.87 2312.87,1159.03 2329.52,1175.68 2426.35,1175.68 2435.06,1166.97 2539.63,1166.97 2821.81,1449.15 2821.81,1764.03 2800.85,1785 v1(2695,1785)
BG2: QC1.4 U2.19 | length 1172.1
  POWER/SIGNAL w10: v1(2245,1170) 2246.67,1168.33 2246.67,1124.5 U2.19@2247.17,1124 ; QC1.4@2685,1716.57 2692.8,1724.37 2692.8,1742.8 2697.39,1747.39 2697.39,1752.39 v1(2700,1755)
  Signal w10: v1(2245,1170) 2247.92,1170 2267.14,1189.22 2434.02,1189.22 2441.27,1181.97 2533.42,1181.97 2800.85,1449.4 2800.85,1749.14 2794.99,1755 v1(2700,1755)
BOOST1: CA1.2 R35.3 U2.36 | length 1539.1
  POWER/SIGNAL w10: v1(1930.5,1410) 1930.5,1353.3 1935,1348.8 U2.36@1932.2,1346 ; v1(2547.51,2207.52) 2653.23,2207.52 2660.75,2200 ; CA1.2@2660,2171.85 2660,2199.25 2660.75,2200 ; R35.3@2696.5,2232.6 2696.5,2200 2660.75,2200
  Signal w10: v1(1930.5,1410) 1930.5,1873.58 2312.73,2255.81 2499.22,2255.81 v1(2547.51,2207.52)
BOOST2: CB1.1 R35.6 U2.22 | length 1613.6
  POWER/SIGNAL w10: U2.22@2207.8,1346 2207.65,1346.14 v1(2207.65,1390) 2207.65,1401.81 2217.91,1412.07 2261.85,1412.07 2264.76,1409.16 2274.25,1409.16 CB1.1@2274.25,1398.72 ; v1(2797.5,2345) 2797.5,2313.11 2797.65,2313.25 2799.15,2314.75 2805,2308.9 2803.5,2307.4 R35.6@2812.5,2307.4 ; 2798.4,2314 v1@2799.15,2345
  Signal w10: v1(2207.65,1390) 2207.65,1386.43 2235.89,1358.19 2258.11,1358.19 2405.92,1506 2597.21,1506 2668.19,1576.98 2668.19,1600.41 2671.14,1603.36 2671.14,1625.58 2668.19,1628.53 2668.19,2086.62 2797.58,2216.01 2797.5,2216.01 v1(2797.5,2345)
"Drouge Chute": P1.11 Q8.2 | length 5448.9
  POWER/SIGNAL w10: P1.11@250,1555 140,1445 140,203.79 186.79,157 2776,157 2930,311 2930,862.2 2899.7,892.5 2772.38,892.5 2747.94,868.06 2412.43,868.06 2390.04,845.67 Q8.2@2390.04,789.8